# EAGLE board Arduino_Nanolu_Ilk_Lezzetli_Kart (EAGLE 9.6.1)
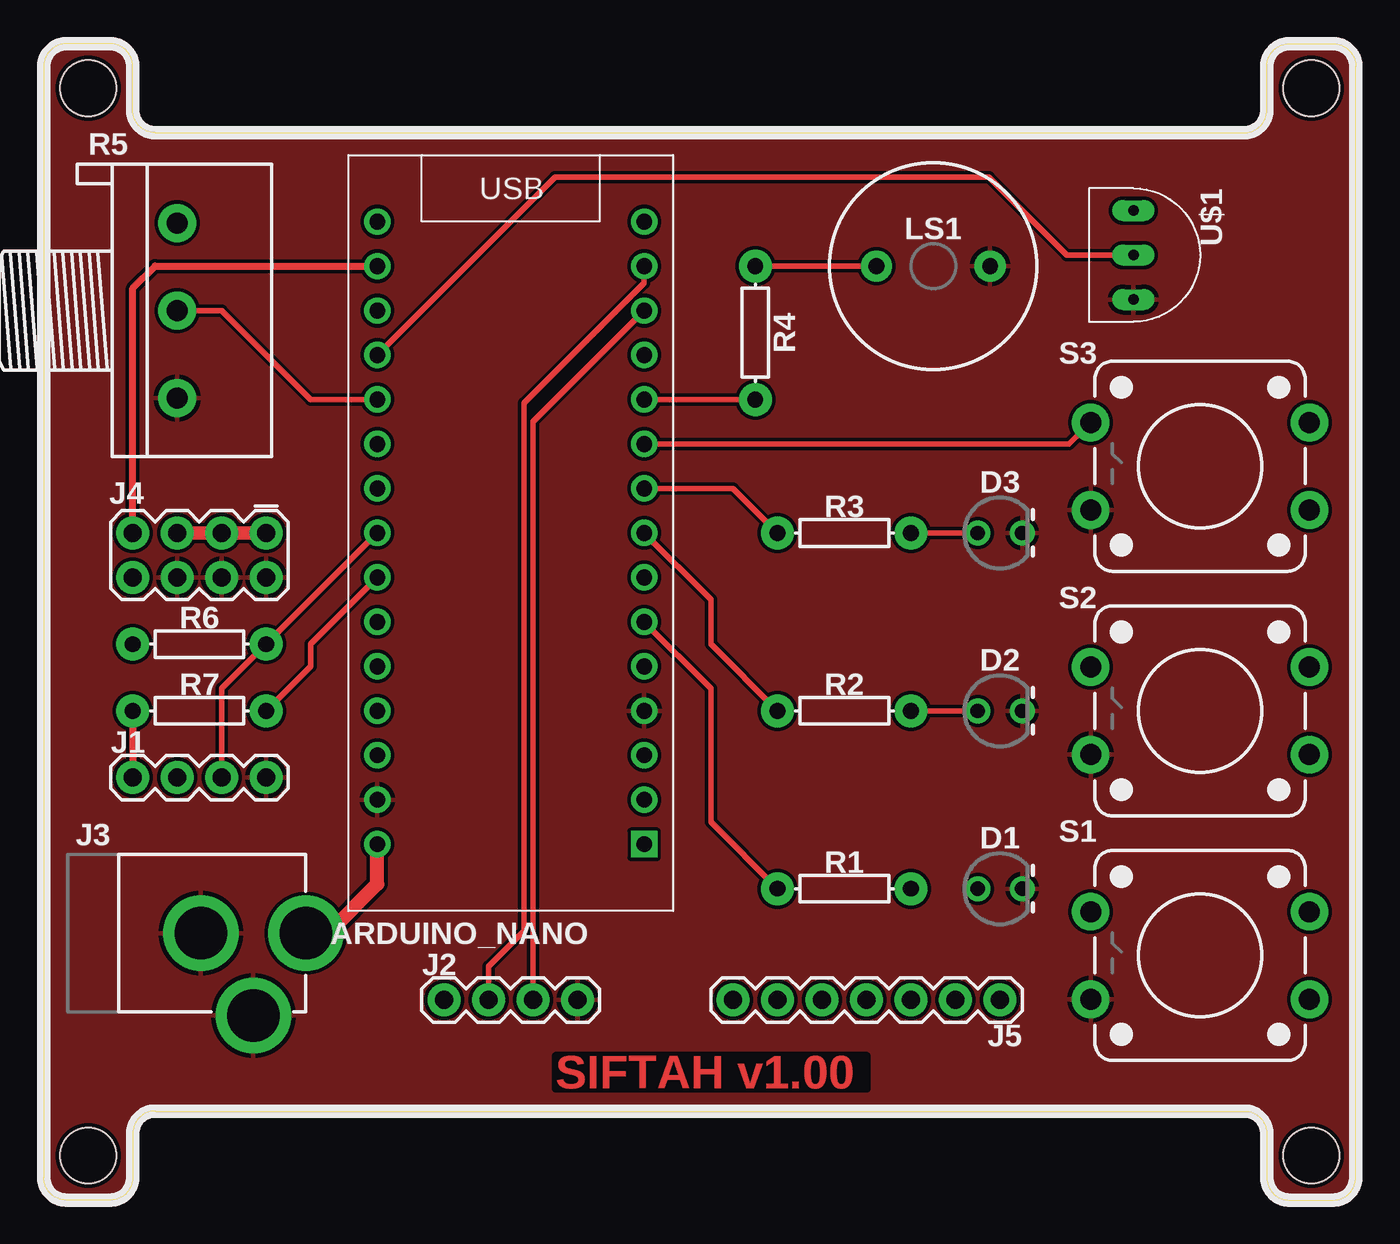
[diagram p0: board, top side]
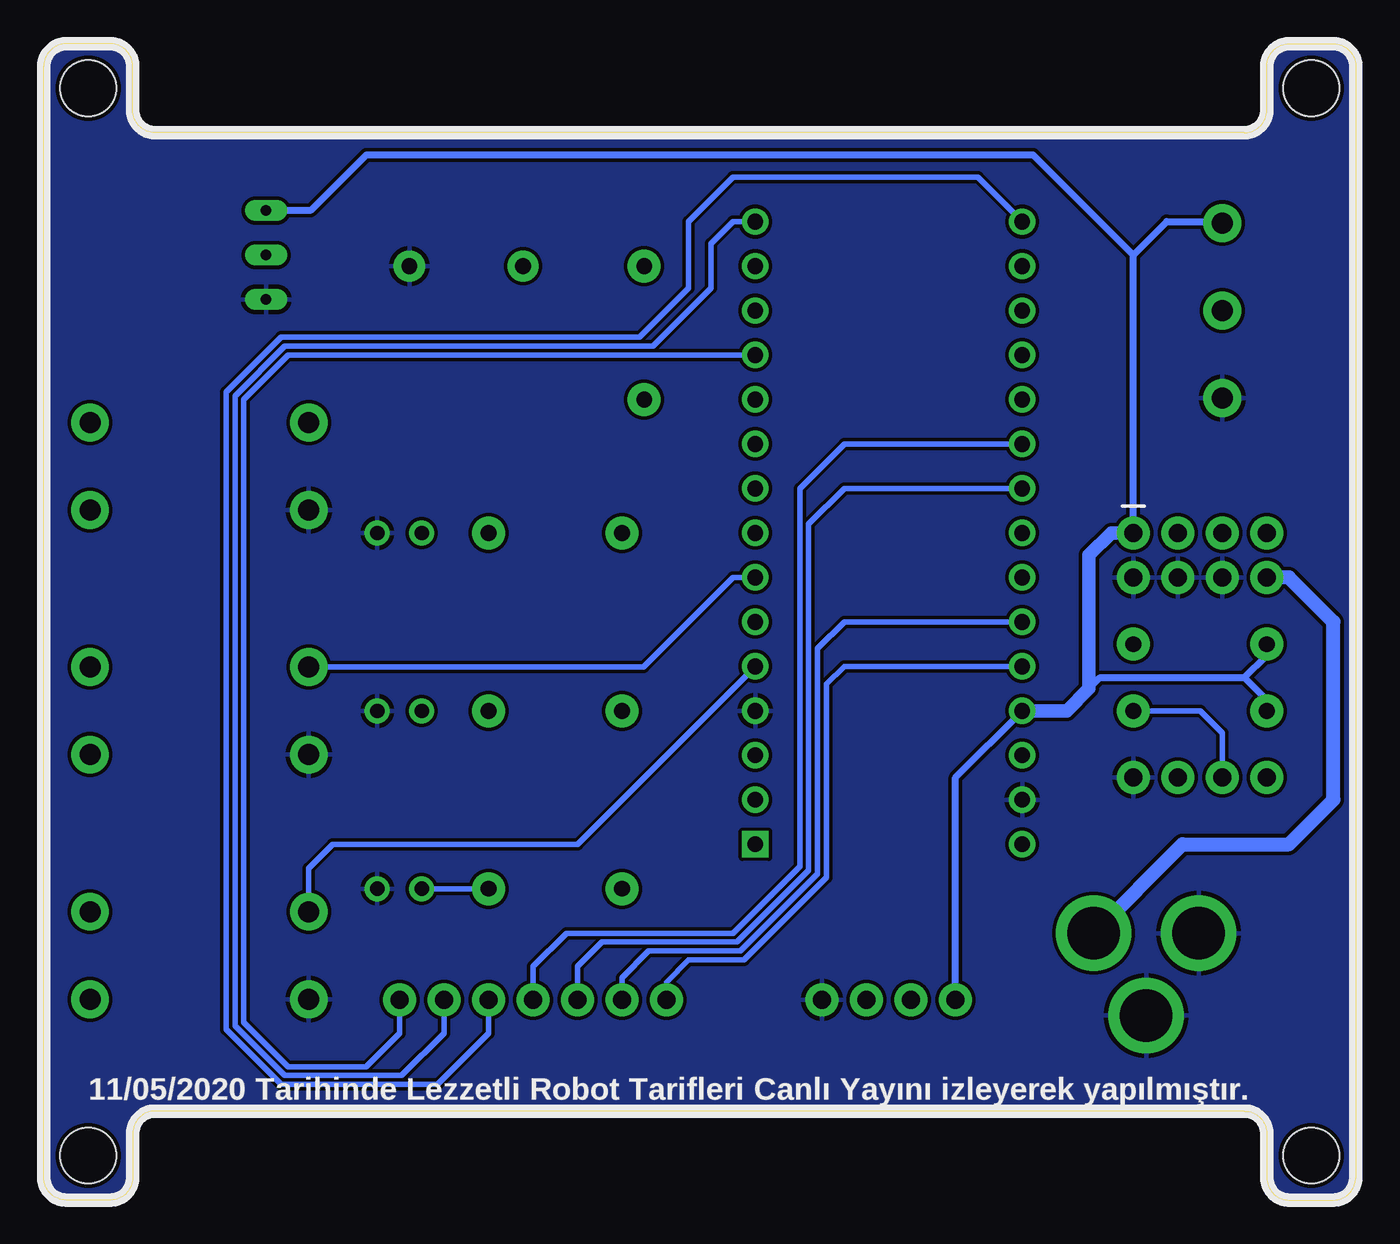
[diagram p1: board, bottom side, seen from below]

Size 74.93 x 66.04 mm. Coordinates in mm from the lower left corner, seen from the top.
Outline: 6.35,5.08 68.58,5.08 arc-90 69.85,3.81 69.85,1.27 arc90 71.12,0 73.66,0 arc90 74.93,1.27 74.93,64.77 arc90 73.66,66.04 71.12,66.04 arc90 69.85,64.77 69.85,62.23 arc-90 68.58,60.96 6.35,60.96 arc-90 5.08,62.23 5.08,64.77 arc90 3.81,66.04 1.27,66.04 arc90 0,64.77 0,1.27 arc90 1.27,0 3.81,0 arc90 5.08,1.27 5.08,3.81 arc-90 6.35,5.08
Copper layers (1*16): Top 0.035mm / dielectric 1.5mm / Bottom 0.035mm
Design rules "SparkFun": minimum track width 8mil, minimum drill 20mil, track to track 8mil, track to pad 8mil, pad to pad 8mil, via to via 8mil, smd to smd 8mil, copper to edge 10mil, drill to drill 8mil, minimum pad ring 12mil, minimum via ring 10mil, stop-mask expansion 4mil, vias tented up to drill 25mil, thermal gap 10mil
Holes 3.2 mm at 2.54,63.5 72.39,63.5 72.39,2.54 2.54,2.54

## Footprints (pad centres in the part's own frame; a part is rotated, then mirrored left to right if it is on the bottom)
ARDUINO_NANO = drill 0.9: 3V3 7.62,-15.24; 5V 7.62,10.16; A0 7.62,-10.16; A1 7.62,-7.62; A2 7.62,-5.08; A3 7.62,-2.54; A4 7.62,0; A5 7.62,2.54; A6 7.62,5.08; A7 7.62,7.62; D2 -7.62,7.62; D3 -7.62,5.08; D4 -7.62,2.54; D5 -7.62,0; D6 -7.62,-2.54; D7 -7.62,-5.08; D8 -7.62,-7.62; D9 -7.62,-10.16; D10 -7.62,-12.7; D11 -7.62,-15.24; D12 -7.62,-17.78; D13 7.62,-17.78; GND@1 -7.62,10.16; GND@2 7.62,15.24; REF 7.62,-12.7; RST@1 -7.62,12.7; RST@2 7.62,12.7; RX0 -7.62,15.24; VIN 7.62,17.78 | drill 0.9 square: TX1 -7.62,17.78
LED_3MM-NS = drill 0.813: A -1.27,0; K 1.27,0
1X04 = drill 1.016 pad 1.88: 1 0,0; 2 2.54,0; 3 5.08,0; 4 7.62,0
POWER_JACK_PTH = drill 2.997 pad 4.318: GND 0,7.7; GNDBREAK 4.7,10.7; PWR 0,13.7
2X4 = drill 1.016 pad 1.88: 1 -3.81,-1.27; 2 -3.81,1.27; 3 -1.27,-1.27; 4 -1.27,1.27; 5 1.27,-1.27; 6 1.27,1.27; 7 3.81,-1.27; 8 3.81,1.27
1X07 = drill 1.016 pad 1.88: 1 0,0; 2 2.54,0; 3 5.08,0; 4 7.62,0; 5 10.16,0; 6 12.7,0; 7 15.24,0
BUZZER-12MM = drill 0.9 pad 1.778: + 3.25,0; - -3.25,0
AXIAL-0.3 = drill 0.9 pad 1.88: P$1 -3.81,0; P$2 3.81,0
3RP/1610N = drill 1.2 pad 2.184: 1 -5,0; 2 0,0; 3 5,0
TACTILE_SWITCH_PTH_12MM = drill 1.2 pad 2.159: 1 6.25,-2.5; 2 -6.25,-2.5; 3 6.25,2.5; 4 -6.25,2.5
TO-92 = drill 0.6 long: 1 -2.54,0; 2 0,0; 3 2.54,0

## Placement (x,y rotation side)
ARDUINO_NANO  [ARDUINO_NANO]  26.67,38.1 180 top
D1  [LED_3MM-NS]  54.61,17.78 0 top
D2  [LED_3MM-NS]  54.61,27.94 0 top
D3  [LED_3MM-NS]  54.61,38.1 0 top
J1  [1X04]  5.08,24.13 0 top
J2  [1X04]  22.86,11.43 0 top
J3  POWER  [POWER_JACK_PTH]  1.27,15.24 270 top
J4  [2X4]  8.89,36.83 180 top
J5  [1X07]  54.61,11.43 180 top
LS1  BUZZER  [BUZZER-12MM]  50.8,53.34 180 top
R1  330  [AXIAL-0.3]  45.72,17.78 180 top
R2  330  [AXIAL-0.3]  45.72,27.94 180 top
R3  330  [AXIAL-0.3]  45.72,38.1 180 top
R4  330  [AXIAL-0.3]  40.64,49.53 270 top
R5  [3RP/1610N]  7.62,50.8 270 top
R6  4700  [AXIAL-0.3]  8.89,31.75 180 top
R7  4700  [AXIAL-0.3]  8.89,27.94 180 top
S1  12MM  [TACTILE_SWITCH_PTH_12MM]  66.04,13.97 180 top
S2  12MM  [TACTILE_SWITCH_PTH_12MM]  66.04,27.94 180 top
S3  12MM  [TACTILE_SWITCH_PTH_12MM]  66.04,41.91 180 top
U$1  LM35  [TO-92]  62.23,53.98 270 top

## Library data of the parts
ARDUINO_NANO U$1 = Arikaya_lib
D1-D3 = SparkFun-LED
J1 J2 = SparkFun-Connectors; PROD_ID: CONN-09696
J3 = SparkFun-Connectors; PROD_ID: CONN-08197
J4 J5 = SparkFun-Connectors
LS1 = SparkFun-Electromechanical; PROD_ID: COMP-08253; SF_SKU: COM-07950
R1-R4 R6 R7 = SparkFun-Resistors; PROD_ID: RES-08380
R5 = pot
S1-S3 = SparkFun-Switches; PROD_ID: SWCH-09185; SF_SKU: COM-09190

## Nets
3.3V: ARDUINO_NANO.3V3 J4.7
A2: ARDUINO_NANO.A2 J5.4
A3: ARDUINO_NANO.A3 J5.5
A6: ARDUINO_NANO.A6 J5.6
A7: ARDUINO_NANO.A7 J5.7
BUTON1: ARDUINO_NANO.D2 S1.1
BUTON2: ARDUINO_NANO.D4 S2.1
BUTON3: ARDUINO_NANO.D7 S3.1
BUZZER: ARDUINO_NANO.D8 R4.P$2
D9: ARDUINO_NANO.D9 J5.1
D10_RX: ARDUINO_NANO.D10 J2.3
D11_TX: ARDUINO_NANO.D11 J2.2
D12: ARDUINO_NANO.D12 J5.2
D13: ARDUINO_NANO.D13 J5.3
GND: ARDUINO_NANO.GND@1 ARDUINO_NANO.GND@2 D1.K D2.K D3.K J1.4 J2.4 J3.GND J3.GNDBREAK J4.2 J4.4 J4.6 LS1.- R5.3 S1.3 S2.3 S3.3 U$1.3
LED1: ARDUINO_NANO.D3 R1.P$2
LED2: ARDUINO_NANO.D5 R2.P$2
LED3: ARDUINO_NANO.D6 R3.P$2
N$2: LS1.+ R4.P$1
N$5: D1.A R1.P$1
N$6: D2.A R2.P$1
N$7: D3.A R3.P$1
SCL: ARDUINO_NANO.A5 J1.2 R7.P$1
SDA: ARDUINO_NANO.A4 J1.3 R6.P$1
VCC: ARDUINO_NANO.5V J1.1 J2.1 J4.1 J4.3 J4.5 R5.1 R6.P$2 R7.P$2 U$1.1
VIN: ARDUINO_NANO.VIN J3.PWR J4.8
VOUT: ARDUINO_NANO.A0 U$1.2
VPOT: ARDUINO_NANO.A1 R5.2

## Tracks (layer width: path | path; a pad name or v marks a point on that pad's centre or on a via)
3.3V
  Top 0.406: J4.7 5.08,52.07 6.35,53.34 ARDUINO_NANO.3V3
A2
  Bottom 0.305: ARDUINO_NANO.A2 29.21,43.18 31.75,40.64 31.75,19.05 35.56,15.24 45.09,15.24 46.99,13.34 J5.4
A3
  Bottom 0.305: J5.5 44.45,13.34 43.05,14.73 35.35,14.73 31.24,18.84 31.24,38.61 29.21,40.64 ARDUINO_NANO.A3
A6
  Bottom 0.305: ARDUINO_NANO.A6 29.21,33.02 30.73,31.5 30.73,18.63 35.14,14.22 40.39,14.22 41.91,12.7 J5.6
A7
  Bottom 0.305: ARDUINO_NANO.A7 29.21,30.48 30.23,29.46 30.23,18.42 34.93,13.72 38.1,13.72 39.37,12.45 J5.7
BUTON1
  Bottom 0.305: ARDUINO_NANO.D2 44.45,20.32 58.42,20.32 59.79,18.95 S1.1
BUTON2
  Bottom 0.305: ARDUINO_NANO.D4 35.56,35.56 40.68,30.44 S2.1
BUTON3
  Top 0.305: ARDUINO_NANO.D7 58.56,43.18 S3.1
BUZZER
  Top 0.305: ARDUINO_NANO.D8 R4.P$2
D9
  Bottom 0.305: ARDUINO_NANO.D9 60.96,48.26 63.5,45.72 63.5,10.16 60.96,7.62 56.52,7.62 54.61,9.53 J5.1
D10_RX
  Top 0.305: ARDUINO_NANO.D10 27.94,44.45 J2.3
D11_TX
  Top 0.305: ARDUINO_NANO.D11 34.29,52.37 27.43,45.51 27.43,15.37 25.4,13.34 J2.2
D12
  Bottom 0.305: ARDUINO_NANO.D12 35.56,55.88 36.83,54.61 36.83,52.07 40.13,48.77 61.17,48.77 64.01,45.93 64.01,9.95 61.17,7.11 54.48,7.11 52.07,9.53 J5.2
D13
  Bottom 0.305: ARDUINO_NANO.D13 21.59,58.42 35.56,58.42 38.1,55.88 38.1,52.07 40.89,49.28 61.38,49.28 64.52,46.14 64.52,9.74 61.38,6.6 52.45,6.6 49.53,9.53 J5.3
GND
  pour Top: -2.54,68.58 -2.54,-2.54 77.47,-2.54 77.47,68.58
  pour Bottom: -5.08,71.12 -5.08,-5.08 80.01,-5.08 80.01,69.85 80.01,71.12
LED1
  Top 0.305: R1.P$2 38.1,21.59 38.1,29.21 ARDUINO_NANO.D3
LED2
  Top 0.305: ARDUINO_NANO.D5 38.1,34.29 38.1,31.75 R2.P$2
LED3
  Top 0.305: ARDUINO_NANO.D6 39.37,40.64 R3.P$2
N$2
  Top 0.305: LS1.+ R4.P$1
N$5
  Bottom 0.305: R1.P$1 D1.A
N$6
  Top 0.305: R2.P$1 D2.A
N$7
  Top 0.305: D3.A R3.P$1
SCL
  Top 0.305: R7.P$1 15.24,30.48 15.24,31.75 ARDUINO_NANO.A5
  Bottom 0.305: R7.P$1 8.89,27.94 7.62,26.67 J1.2
SDA
  Top 0.305: ARDUINO_NANO.A4 R6.P$1 10.16,29.21 J1.3
VCC
  Top 0.406: R7.P$2 J1.1
  Top 0.762: J4.5 J4.3 J4.1
  Bottom 0.406: R6.P$2 5.08,31.11 6.35,29.84 | 6.35,29.84 5.08,28.57 R7.P$2 | 15.24,29.21 14.61,29.84 6.35,29.84 | J2.1 22.86,24.13 ARDUINO_NANO.5V | J4.1 12.7,53.98 | 12.7,53.98 10.79,55.88 7.7,55.88 R5.1 | U$1.1 59.69,56.52 56.52,59.69 18.41,59.69 12.7,53.98
  Bottom 0.762: J4.1 13.97,38.1 15.24,36.83 15.24,29.21 16.51,27.94 ARDUINO_NANO.5V
VIN
  Top 0.813: J3.PWR 16.24,15.24 19.05,18.05 ARDUINO_NANO.VIN
  Bottom 0.813: J3.PWR 9.89,20.32 3.81,20.32 1.27,22.86 1.27,33.02 3.81,35.56 J4.8
VOUT
  Top 0.305: ARDUINO_NANO.A0 29.21,58.42 53.98,58.42 58.42,53.98 U$1.2
VPOT
  Top 0.305: ARDUINO_NANO.A1 15.24,45.72 10.16,50.8 R5.2

## Text on the board
Top: SIFTAH v1.00
bPlace: 11/05/2020 Tarihinde Lezzetli Robot Tarifleri Canlı Yayını izleyerek yapılmıştır.
tStop: SIFTAH v1.00